# EAGLE board turtle (EAGLE 7.1.0)
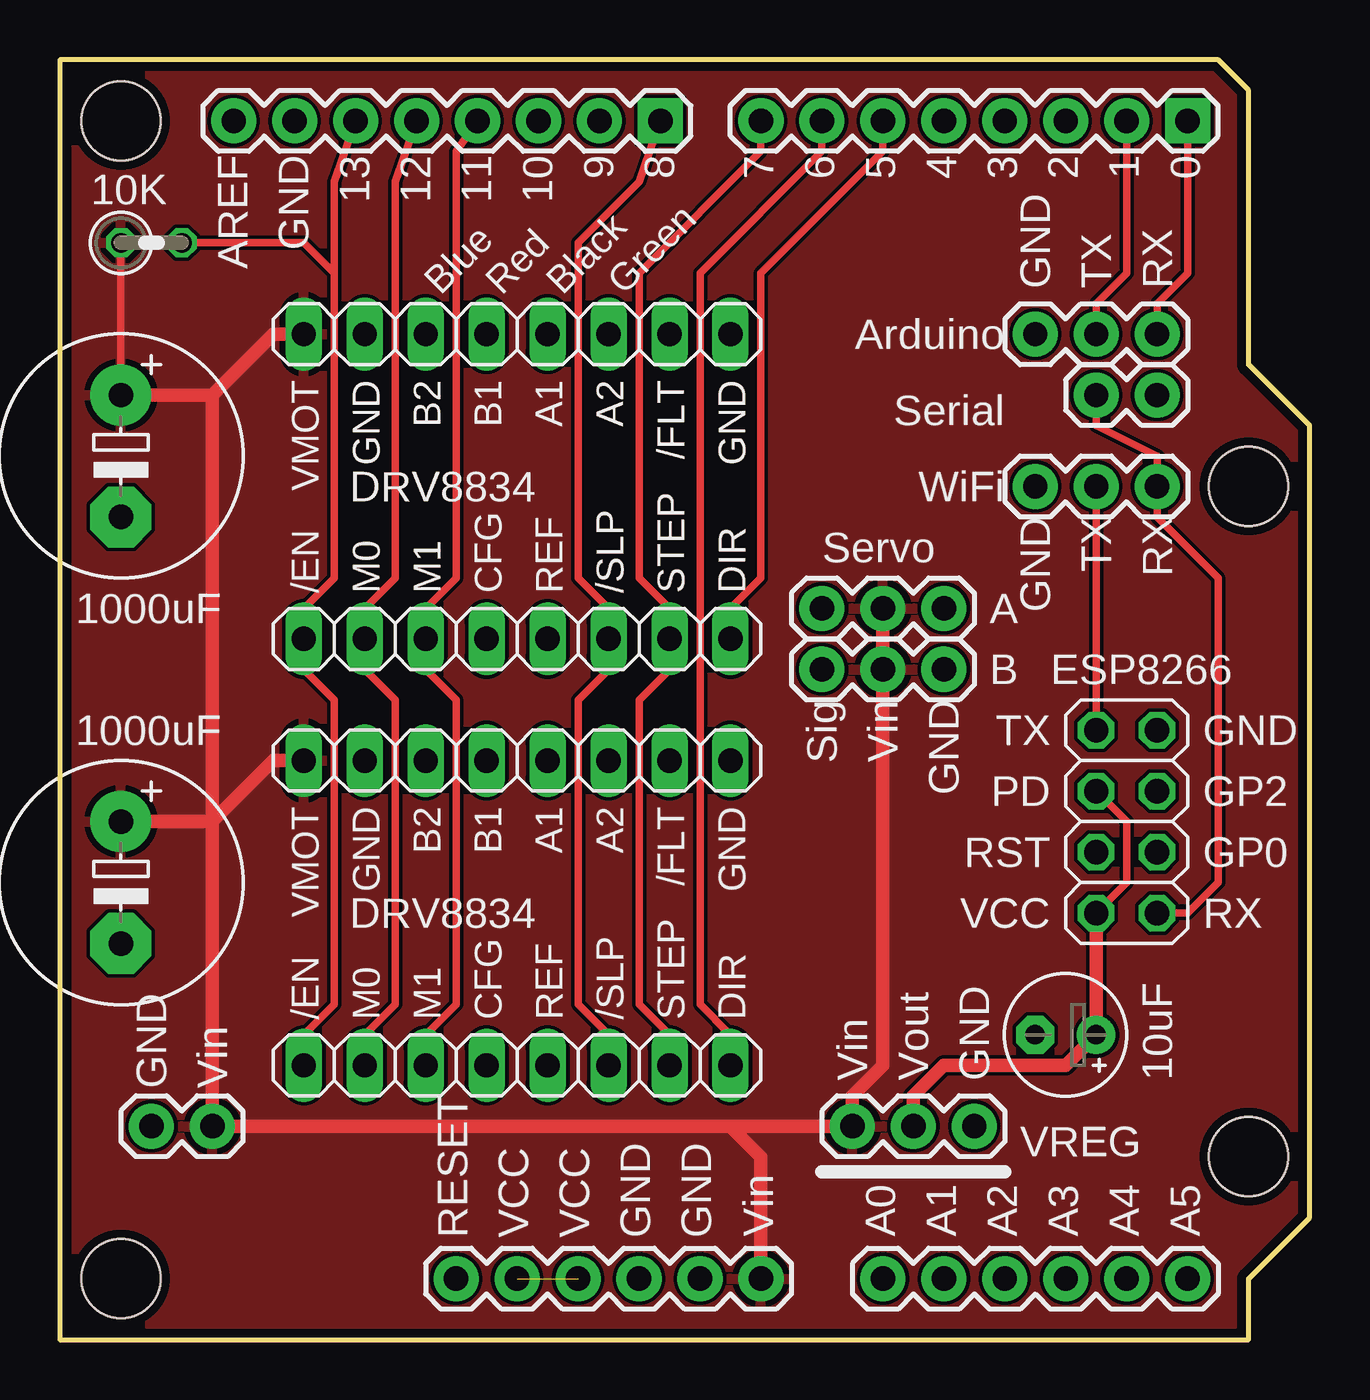
[diagram p0: board, top side]
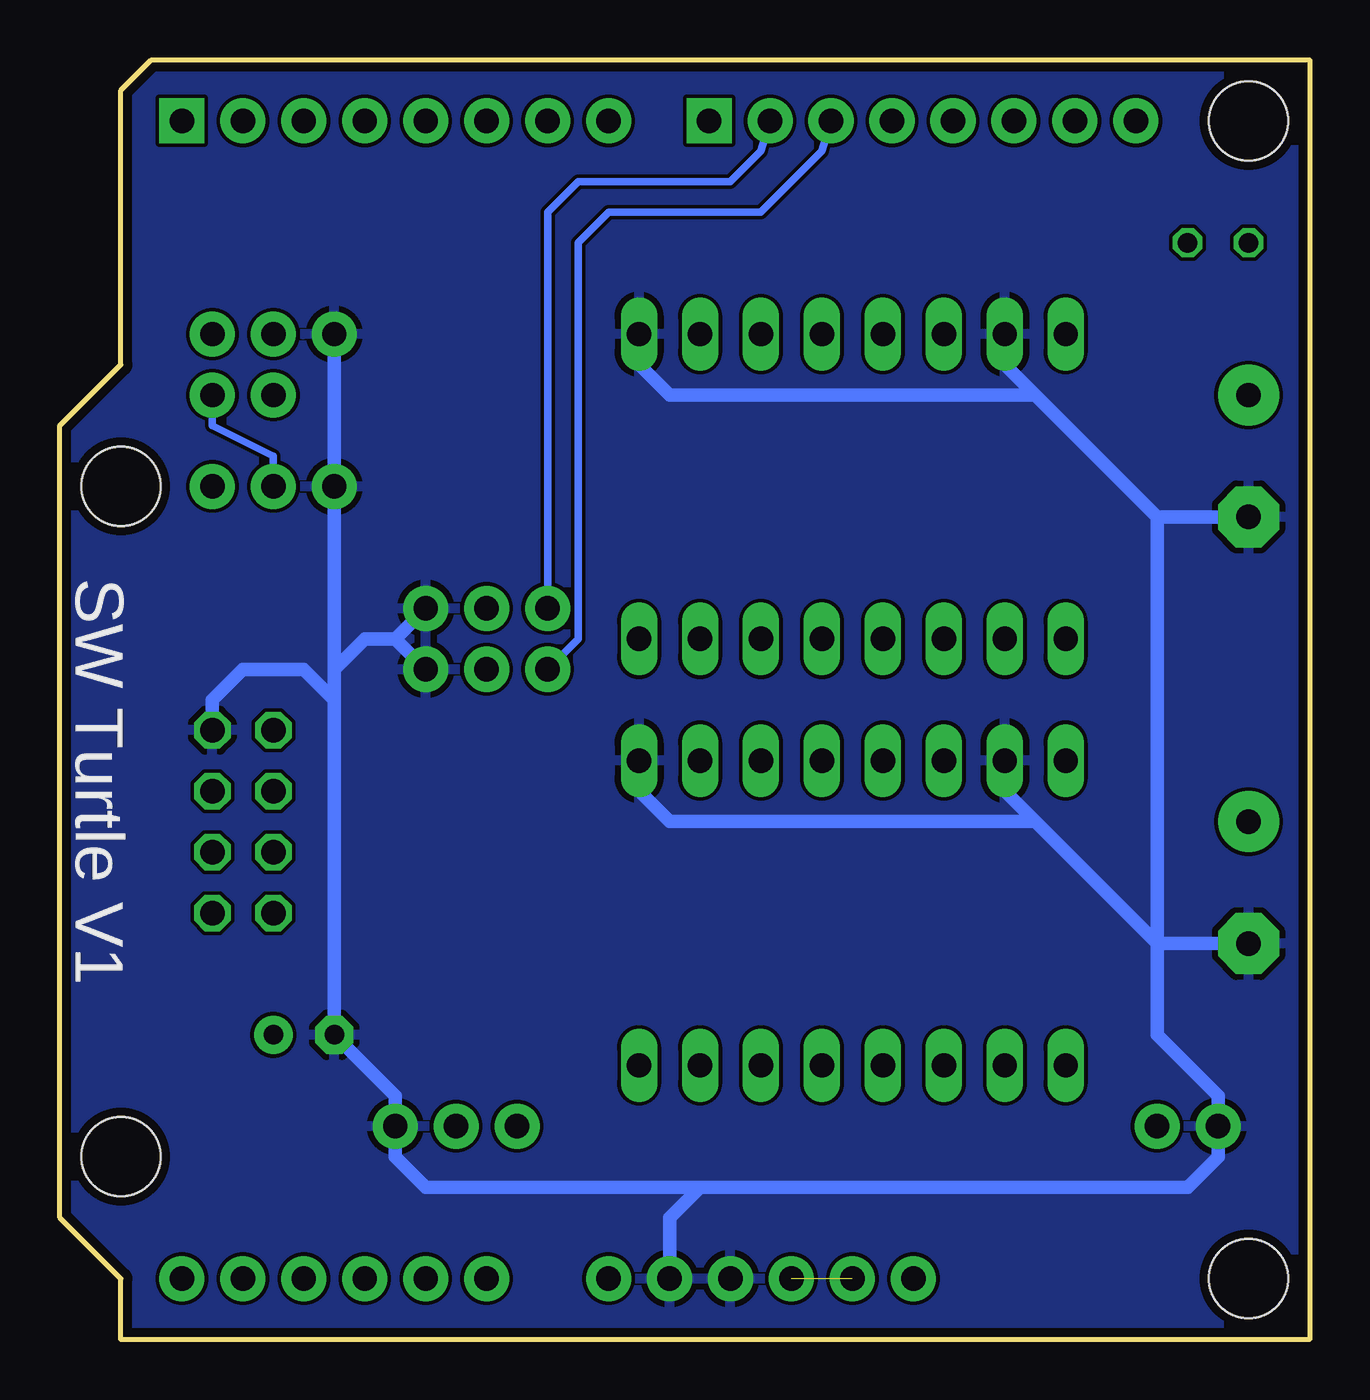
[diagram p1: board, bottom side, seen from below]

Size 52.07 x 53.34 mm. Coordinates in mm from the lower left corner, seen from the top.
Outline: 0,53.34 0,0 49.53,0 49.53,2.54 52.07,5.08 52.07,38.1 49.53,40.64 49.53,52.07 48.26,53.34 0,53.34
Copper layers (1*16): Top 0.0356mm / dielectric 1.5011mm / Bottom 0.0356mm
Design rules "oshpark-2layer": minimum track width 6mil, minimum drill 13mil, track to track 6mil, track to pad 6mil, pad to pad 6mil, via to via 6mil, smd to smd 6mil, copper to edge 15mil, drill to drill 6mil, minimum pad ring 7mil, minimum via ring 7mil, stop-mask expansion 4mil, vias tented up to drill 0mil, thermal gap 10mil
Net classes: 0 default: width 0.203 mm; 1 vcc: width 0.254 mm

## Footprints (pad centres in the part's own frame; a part is rotated, then mirrored left to right if it is on the bottom)
1X03 = drill 1.016 pad 1.88: 1 0,0; 2 2.54,0; 3 5.08,0
2X04 = drill 1.016 octagon: 1 -3.81,-1.27; 2 -3.81,1.27; 3 -1.27,-1.27; 4 -1.27,1.27; 5 1.27,-1.27; 6 1.27,1.27; 7 3.81,-1.27; 8 3.81,1.27
1X02 = drill 1.016 pad 1.88: 1 0,0; 2 2.54,0
E5-10,5 = drill 1.016 pad 2.54: + -2.54,0 | drill 1.016 pad 2.54 octagon: - 2.54,0
E2,5-5 = drill 0.813 pad 1.6: + -1.27,0 | drill 0.813 pad 1.6 octagon: - 1.27,0
0207/2V = drill 0.813 octagon: 1 -1.27,0; 2 1.27,0
1X08 = drill 1.016 pad 1.88 square: 1 0,0 | drill 1.016 pad 1.88: 2 2.54,0; 3 5.08,0; 4 7.62,0; 5 10.16,0; 6 12.7,0; 7 15.24,0; 8 17.78,0
1X06 = drill 1.016 pad 1.88: 1 0,0; 2 2.54,0; 3 5.08,0; 4 7.62,0; 5 10.16,0; 6 12.7,0
1X08' = drill 1.016 long: 1 -8.89,0; 2 -6.35,0; 3 -3.81,0; 4 -1.27,0; 5 1.27,0; 6 3.81,0; 7 6.35,0; 8 8.89,0
STAND-OFF = hole 3.302: 0,0

## Placement (x,y rotation side)
E$1  [1X03]  31.75,30.48 0 top
E$2  [2X04]  44.45,21.59 90 top
E$3  [1X02]  3.81,8.89 0 top
E$4  [1X03]  31.75,27.94 0 top
E$5  [1X03]  40.64,41.91 0 top
E$6  [E5-10,5]  2.54,19.05 270 top
E$7  [E5-10,5]  2.54,36.83 270 top
E$8  [1X03]  33.02,8.89 0 top
E$9  [E2,5-5]  41.91,12.7 180 top
E$10  [1X03]  40.64,35.56 0 top
E$11  [1X02]  43.18,39.37 0 top
E$12  10K  [0207/2V]  3.81,45.72 0 top
J1  Digital  [1X08]  46.99,50.8 180 top
J2  Analog  [1X06]  34.29,2.54 0 top
J3  [1X08]  25.02,50.8 180 top
J4  POWER  [1X06]  16.51,2.54 0 top
J5  [1X08']  19.05,41.91 180 top
J6  [1X08']  19.05,29.21 180 top
J7  [1X08']  19.05,24.13 180 top
J8  [1X08']  19.05,11.43 180 top
U$1  STAND-OFF  [STAND-OFF]  2.54,50.8 0 top
U$3  STAND-OFF  [STAND-OFF]  2.54,2.54 0 top
U$9  STAND-OFF  [STAND-OFF]  49.53,35.56 0 top
U$10  STAND-OFF  [STAND-OFF]  49.53,7.62 0 top

## Library data of the parts
E$1 E$3-E$5 E$8 E$10 E$11 = SparkFun-Connectors
E$2 J5-J8 = pinhead
E$6 E$7 E$9 = rcl
E$12 = resistor
J1-J4 U$1 U$3 U$9 U$10 = SparkFun

## Nets
A0: J2.1
A1: J2.2
A2: J2.3
A3: J2.4
A4: J2.5
A5: J2.6
D2: J1.3
D3: J1.4
D4: J1.5
D5: J1.6 J6.1
D6: J1.7 J8.1
D7: J1.8 J6.2 J8.2
D8: J3.1 J6.3 J8.3
D9: J3.4 J6.6 J8.6
GND: E$1.3 E$2.7 E$3.1 E$4.3 E$5.1 E$6.- E$7.- E$8.3 E$9.- E$10.1 J4.4 J4.5 J5.1 J5.7 J7.1 J7.7
MISO: J3.5 J6.7 J8.7
RESET: J4.1
RX-IP: E$5.2 J1.2
S$1: E$4.1 J3.3
S$2: E$2.8 E$10.2 E$11.2
S$3: E$1.1 J3.2
S$10: E$2.1 E$10.3 E$11.1
S$11: E$12.2 J3.6 J6.8 J8.8
TX-OP: E$5.3 J1.1
VCC: J4.2 J4.3
VIN [vcc]: E$1.2 E$3.2 E$4.2 E$6.+ E$7.+ E$8.1 E$12.1 J4.6 J5.8 J7.8
VWIFI: E$2.2 E$2.6 E$8.2 E$9.+

## Tracks (layer width: path | path; a pad name or v marks a point on that pad's centre or on a via)
D5
  Top 0.305: J6.1 27.94,30.48 29.21,31.75 29.21,44.45 34.29,49.53 J1.6
D6
  Top 0.305: J8.1 27.94,12.7 26.67,13.97 26.67,44.45 31.75,49.53 J1.7
D7
  Top 0.305: J8.2 25.4,12.7 24.13,13.97 24.13,26.67 25.4,27.94 J6.2 25.4,30.48 24.13,31.75 24.13,44.45 29.21,49.53 J1.8
D8
  Top 0.305: J8.3 22.86,12.7 21.59,13.97 21.59,26.67 22.86,27.94 J6.3 22.86,30.48 21.59,31.75 21.59,45.72 24.13,48.26 J3.1
D9
  Top 0.305: J8.6 15.24,12.7 16.51,13.97 16.51,26.67 15.24,27.94 J6.6 15.24,30.48 16.51,31.75 16.51,49.53 J3.4
GND
  Bottom 0.559: E$6.- 6.35,16.51 | E$7.- 6.35,34.29 | J4.5 26.67,5.08 25.4,6.35 | 6.35,16.51 6.35,12.7 3.81,10.16 E$3.1 3.81,7.62 5.08,6.35 25.4,6.35 | 6.35,16.51 11.43,21.59 | 11.43,21.59 12.7,22.86 J7.7 | 6.35,16.51 6.35,34.29 | 6.35,34.29 11.43,39.37 | 11.43,39.37 12.7,40.64 J5.7 | 25.4,6.35 36.83,6.35 38.1,7.62 E$8.3 38.1,10.16 E$9.- 40.64,26.67 | 11.43,21.59 26.67,21.59 27.94,22.86 J7.1 | 11.43,39.37 26.67,39.37 27.94,40.64 J5.1 | E$2.7 45.72,26.67 44.45,27.94 41.91,27.94 40.64,26.67 | E$1.3 38.1,29.21 | E$4.3 38.1,29.21 | 38.1,29.21 39.37,29.21 40.64,27.94 | E$5.1 E$10.1 40.64,27.94 | 40.64,27.94 40.64,26.67
  pour Bottom: 0,53.34 48.26,53.34 49.53,52.07 49.53,40.64 52.07,38.1 52.07,5.08 49.53,2.54 49.53,0 0,0
MISO
  Top 0.305: J8.7 12.7,12.7 13.97,13.97 13.97,26.67 12.7,27.94 J6.7 12.7,30.48 13.97,31.75 13.97,48.26 J3.5
RX-IP
  Top 0.305: E$5.2 43.18,43.18 44.45,44.45 J1.2
S$1
  Bottom 0.305: E$4.1 30.48,29.21 30.48,45.72 29.21,46.99 22.86,46.99 20.32,49.53 J3.3
S$2
  Top 0.305: E$2.8 E$10.2
  Bottom 0.305: E$11.2 45.72,38.1 43.18,36.83 E$10.2
S$3
  Bottom 0.305: E$1.1 31.75,46.99 30.48,48.26 24.13,48.26 22.86,49.53 J3.2
S$10
  Top 0.305: E$2.1 46.99,17.78 48.26,19.05 48.26,31.75 45.72,34.29 E$10.3 45.72,36.83 43.18,38.1 E$11.1
S$11
  Top 0.305: J8.8 10.16,12.7 11.43,13.97 11.43,26.67 10.16,27.94 J6.8 10.16,30.48 11.43,31.75 11.43,44.45 | E$12.2 10.16,45.72 11.43,44.45 | J3.6 11.43,48.26 11.43,44.45
TX-OP
  Top 0.305: J1.1 46.99,44.45 45.72,43.18 E$5.3
VCC  (1 unrouted)
VIN
  Top 0.305: E$7.+ E$12.1
  Top 0.559: 6.35,21.59 8.89,24.13 J7.8 | 6.35,21.59 6.35,39.37 | 6.35,39.37 8.89,41.91 J5.8 | E$7.+ 6.35,39.37 | E$6.+ 6.35,21.59 | 27.94,8.89 E$8.1 33.02,10.16 34.29,11.43 E$4.2 E$1.2 | 27.94,8.89 29.21,7.62 J4.6 | 27.94,8.89 E$3.2 6.35,21.59
  pour Top: 0,53.34 48.26,53.34 49.53,52.07 49.53,40.64 52.07,38.1 52.07,5.08 49.53,2.54 49.53,0 0,0
VWIFI
  Top 0.305: E$2.6 44.45,21.59 44.45,19.05 E$2.2
  Top 0.559: E$8.2 35.56,10.16 36.83,11.43 41.91,11.43 E$9.+ E$2.2

## Text on the board
tPlace: AREF | GND | 13 | 12 | 11 | 10 | 9 | 8 | 7 | 6 | 5 | 4 | 3 | 2 | 1 | 0 | 10K | GND | TX | RX | Blue | Red | Black | Green | Arduino | VMOT | GND | B2 | B1 | A1 | A2 | /FLT | GND | Serial | WiFi | DRV8834 | GND | TX | RX | Servo | /EN | M0 | M1 | CFG | REF | /SLP | STEP | DIR | 1000uF | A | Sig | Vin | GND | B | ESP8266 | 1000uF | TX | GND | VMOT | GND | B2 | B1 | A1 | A2 | /FLT | GND | PD | GP2 | RST | GP0 | DRV8834 | VCC | RX | /EN | M0 | M1 | CFG | REF | /SLP | STEP | DIR | Vin | Vout | GND | 10uF | GND | Vin | VREG | RESET | VCC | VCC | GND | GND | Vin | A0 | A1 | A2 | A3 | A4 | A5
bNames: SW Turtle V1